# Altium PCB PCB1_main.PcbDoc
Units mm, origin at the board's own origin, x right, y up, seen from the top; angles counter-clockwise.
Board outline 140 x 35 mm, 2 copper layers (Top Layer, Bottom Layer); 22 components, 44 nets, 192 pads, 0 vias.
Unrouted connection lines stored in the file: 118.
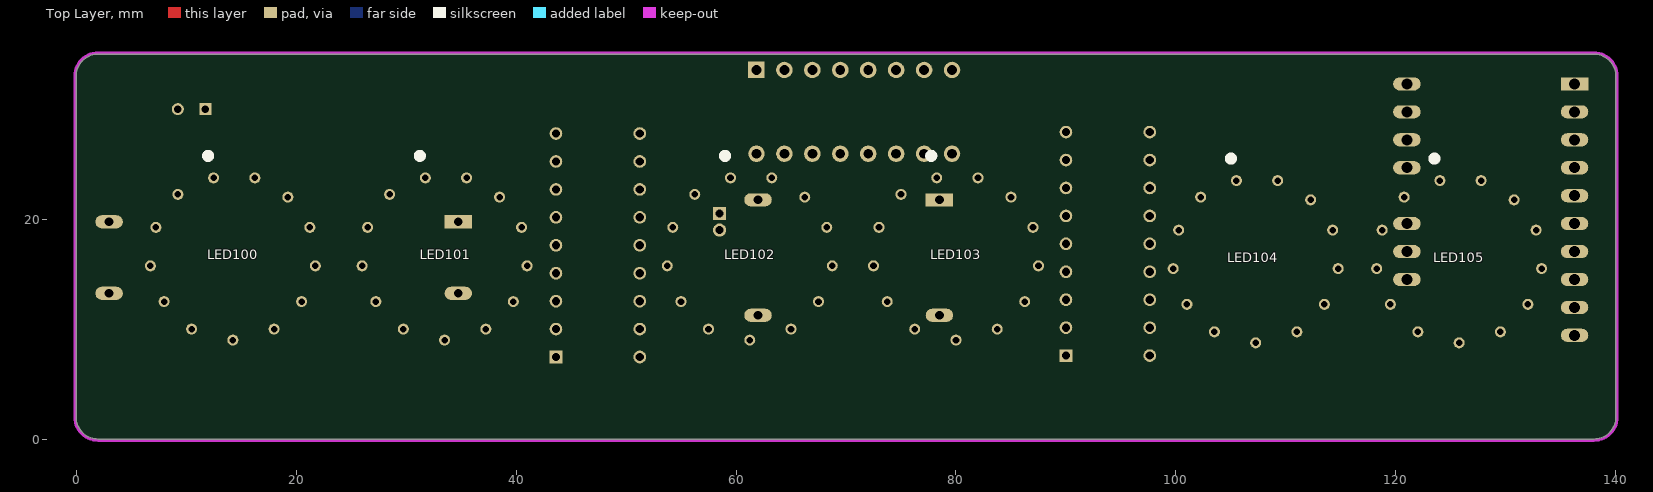
[diagram p0: Top Layer view]
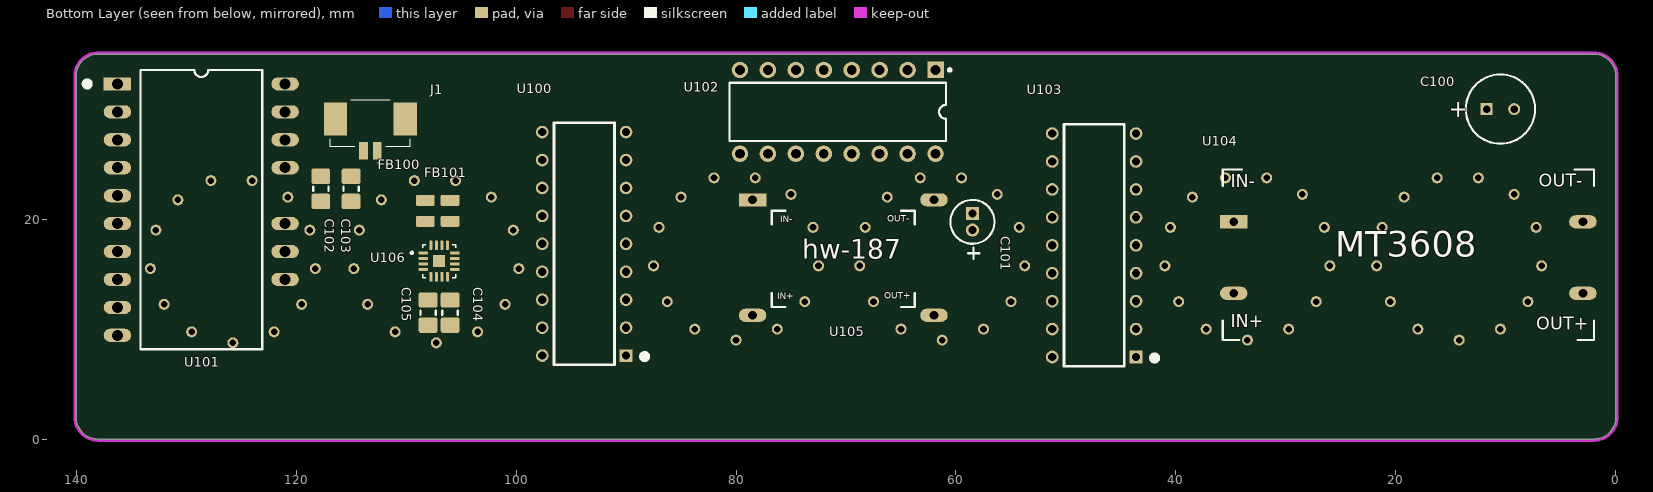
[diagram p1: Bottom Layer view, seen from below]

## Layer stack, top to bottom
Top Solder: solder mask 0.0102, Solder Resist, Dk 3.5
Top Layer: signal copper 0.0356
Dielectric 1: dielectric 0.32, FR-4, Dk 4.8
Bottom Layer: signal copper 0.0356
Bottom Solder: solder mask 0.0102, Solder Resist, Dk 3.5

## Board outline
2,0 cw(c2,2) 0,2 0,33 cw(c2,33) 2,35 138,35 cw(c138,33) 140,33 140,2 cw(c138,2) 138,0

## Design rules (kind name [scope] priority, off if disabled: settings)
Clearance [All] p1: gap=0.254 ignorepadtopadclearanceinfootprint=FALSE
PolygonConnect [All] p1: connectstyle=Relief reliefconductorwidth=0.254 reliefentries=4 polygonreliefangle="90 Angle" airgapwidth=0.254
RoutingVias [All] p1: holewidth=0.711 width=1.27 viastyle="Through Hole" minholewidth=0.711 minwidth=1.27 maxholewidth=0.711 maxwidth=1.27
SolderMaskExpansion [All] p1: expansion=0.102 istentingtop=FALSE
SupplyNets "Schematic Supply Nets_3" [InNet('GND')] p1: voltage=0.000
SupplyNets "Schematic Supply Nets_2" [InNet('VCC')] p2: voltage=0.000
SupplyNets "Schematic Supply Nets_1" [InNet('+5')] p3: voltage=0.000
SupplyNets "Schematic Supply Nets" [InNet('1V')] p4: voltage=0.000
Width [All] p1: maxlimit=0.254 minlimit=0.254 preferedwidth=0.254
30 further rules are at their usual default settings.

## Components (designator, comment, footprint, x,y, rotation, side; value= is the part's Value field where it differs from the comment)
C100 "100uF 10V" CAP_100U_10V_PRD250W50D630H800 11.75,30 r180 bottom
C101 "22u 10V" CAP_D4MM_LS1.5MM 58.5,19 r90 bottom
C102 "C0805" CAP_0805 117.75,22.75 r90 bottom
C103 "C0805" CAP_0805 115,22.75 r90 bottom
C104 "C0805" CAP_0805 106,11.5 r90 bottom
C105 "C0805" CAP_0805 108,11.5 r90 bottom
FB100 "FB0805  Ω" FB_0805 108.25,20.75 r90 bottom
FB101 "FB0805  Ω" FB_0805 106,20.75 r90 bottom
J1 "Connector 1.25mm" 532610271 113.25,28.5 r180 bottom
LED100 "VFD" VFD_TUBE_IV3 14.25,16.5 r0 top
LED101 "VFD" VFD_TUBE_IV3 33.5,16.5 r0 top
LED102 "VFD" VFD_TUBE_IV3 61.25,16.5 r0 top
LED103 "VFD" VFD_TUBE_IV3 80,16.5 r0 top
LED104 "VFD" VFD_TUBE_IV3 107.25,16.25 r0 top
LED105 "VFD" VFD_TUBE_IV3 125.75,16.25 r0 top
U100 "TBD6278" TBD62783_DIP762W55P254L2286H480Q18N 93.81,17.75 r0 bottom
U101 "ESP32C6_Mini" "ESP32_MINIMODULE - DUPLICATE" 136.24,32.29 r180 bottom
U102 "CD4017" CD4017_N0016A 70.75,29.75 r270 bottom
U103 "TDB6278" TBD62783_DIP762W55P254L2286H480Q18N 47.44,17.62 r0 bottom
U104 "DC-DC Boost" BOOST_MT3608 37.5,25.75 r180 bottom
U105 "DC-DC Buck" HW-187 78.5,21.75 r180 bottom
U106 "Class D AMP" TQFN-16_MAX98357 107,16.185 r180 bottom

## Footprints (in the part's own frame and the unit in brackets; to place one, negate y for a bottom-side part, rotate by r counter-clockwise, add the part's x,y. Pads: shape width x height; smd on the part's side, far side on the other; paste and mask are expansions set on the pad)
532610271 [mm]
  rect 0.8x1.6 smd: 1(0.625,-2.3) 2(-0.625,-2.3)
  rect 2.1x3 smd: MP1(3.175,0.6) MP2(-3.175,0.6)
  silkscreen extent -3.62,-3.45 3.62,2.3, body extent -3.83,-2.54 3.83,2.66, height 3.4
BOOST_MT3608 [mm]
  rect 2.5x1.2 hole 0.8: 1(2.75,-6)
  oval 2.5x1.2 hole 0.8: 2(2.75,-12.5) 3(34.5,-12.5) 4(34.5,-6)
  silkscreen extent 1.75,-16.75 35.5,-1.25, body extent 0.04,-17.79 37.05,-0.08, height 6.17
CAP_100U_10V_PRD250W50D630H800 [mm]
  rect 1.1x1.1 / inner round 1.1 / far side rect 1.1x1.1 hole 0.7: 1(0,0)
  round 1.1 hole 0.7: 2(2.5,0)
  silkscreen extent -1.9,-3.15 4.4,3.15, body extent -2.14,-3.4 4.65,3.4, height 8
CAP_0805 [mm]
  rrect25% 1.4x1.7 smd: 1(-1.143,0) 2(1.143,0)
  silkscreen extent -0.2,-0.7 0.2,0.7, body extent -1.15,-0.76 1.15,0.79, height 1.01
CAP_D4MM_LS1.5MM [mm]
  round 1.2 hole 0.7: 1(0,0)
  rect 1.2x1.2 / inner round 1.2 / far side rect 1.2x1.2 hole 0.7: 2(1.5,0)
  silkscreen extent -2.61,-2 2.75,2
CD4017_N0016A [mm] "DIP, 16-Leads, Body 19.7x6.6mm, Pitch 2.54mm"
  rect 1.5x1.5 hole 0.9: 1(-3.81,8.89)
  round 1.5 hole 0.9: 2(-3.81,6.35) 3(-3.81,3.81) 4(-3.81,1.27) 5(-3.81,-1.27) 6(-3.81,-3.81) 7(-3.81,-6.35) 8(-3.81,-8.89) 9(3.81,-8.89) 10(3.81,-6.35) 11(3.81,-3.81) 12(3.81,-1.27) 13(3.81,1.27) 14(3.81,3.81) 15(3.81,6.35) 16(3.81,8.89)
  silkscreen extent -3.93,-9.85 2.65,10.31, body extent -3.95,-9.85 3.95,9.85, height 5.08
"ESP32_MINIMODULE - DUPLICATE" [mm]
  rect 2.5x1.2 hole 1: 1(0,0)
  oval 2.5x1.2 hole 1: 2(0,-2.54) 3(0,-5.08) 4(0,-7.62) 5(0,-10.16) 6(0,-12.7) 7(0,-15.24) 8(0,-17.78) 9(0,-20.32) 10(0,-22.86) 13(15.24,-17.78) 14(15.24,-15.24) 15(15.24,-12.7) 17(15.24,-7.62) 18(15.24,-5.08) 19(15.24,-2.54) 20(15.24,0)
  silkscreen extent -3,-24.13 13.16,1.27, body extent -1.25,-24.25 16.75,3.72, height 4.53
FB_0805 [mm]
  rrect25% 1x1.7 smd: 1(-0.95,0) 2(0.95,0)
  body extent -1,-0.63 1,0.63, height 0.86
HW-187 [mm]
  rect 2.5x1.2 hole 0.8: 1(0,0)
  oval 2.5x1.2 hole 0.8: 2(0,-10.5) 3(16.5,-10.5) 4(16.5,0)
  silkscreen extent 1.75,-9.75 14.75,-1, body extent -0.75,-11.25 17.25,0.75, height 3.75
TBD62783_DIP762W55P254L2286H480Q18N [mm]
  rect 1.15x1.15 / inner round 1.15 / far side rect 1.15x1.15 hole 0.75: 1(-3.81,10.16)
  round 1.15 hole 0.75: 2(-3.81,7.62) 3(-3.81,5.08) 4(-3.81,2.54) 5(-3.81,0) 6(-3.81,-2.54) 7(-3.81,-5.08) 8(-3.81,-7.62) 9(-3.81,-10.16) 10(3.81,-10.16) 11(3.81,-7.62) 12(3.81,-5.08) 13(3.81,-2.54) 14(3.81,0) 15(3.81,2.54) 16(3.81,5.08) 17(3.81,7.62) 18(3.81,10.16)
  silkscreen extent -5.75,-11 2.75,11, body extent -3.95,-11.18 3.95,11.68, height 4.8
TQFN-16_MAX98357 [mm]
  rrect25% 0.84x0.27 smd: 1(-1.435,0.75) 2(-1.435,0.25) 3(-1.435,-0.25) 4(-1.435,-0.75) 9(1.435,-0.75) 10(1.435,-0.25) 11(1.435,0.25) 12(1.435,0.75)
  rrect25% 0.27x0.84 smd: 5(-0.75,-1.435) 6(-0.25,-1.435) 7(0.25,-1.435) 8(0.75,-1.435) 13(0.75,1.435) 14(0.25,1.435) 15(-0.25,1.435) 16(-0.75,1.435)
  rect 1.1x1.1 smd paste-0.2: 17(0,0)
  silkscreen extent -2.57,-1.5 1.5,1.5, body extent -1.5,-1.5 1.5,1.5, height 0.9
VFD_TUBE_IV3 [mm]
  round 1 hole 0.6: 1(-1.75,7.25) 2(2,7.25) 3(5,5.5) 4(7,2.75) 5(7.5,-0.75) 6(6.25,-4) 7(3.75,-6.5) 8(0,-7.5) 9(-3.75,-6.5) 10(-6.25,-4) 11(-7.5,-0.75) 12(-7,2.75) 13(-5,5.75)
  silkscreen extent -2.5,9 -2,9.5

## Part data
C100: library part CAP_100u_10V, "Cap Aluminum 100uF 10V 20% (6.3 X 7mm) Radial 2.5mm 80mA 1000 hr 85°C Bulk", Manufacturer=Panasonic, Manufacturer Part Number=ECE-A1AKA101, Supplier Part Number=667-ECE-A1AKA101, Category="Aluminum Electrolytic Capacitors", ComponentLink1Description=https://datasheet.ciiva.com/16390/aba0000ce20-16390502.pdf?src-supplier=Future+Electronics, ComponentLink1URL=https://datasheet.ciiva.com/16390/aba0000ce20-16390502.pdf?src-supplier=Future+Electronics, ComponentLink2Description=https://datasheet.ciiva.com/43459/1339511-43459559.pdf?src-supplier=Farnell, ComponentLink2URL=https://datasheet.ciiva.com/43459/1339511-43459559.pdf?src-supplier=Farnell, ComponentLink3Description=https://datasheet.ciiva.com/2984/aba0000ce20-2984487.pdf?src-supplier=Avnet, ComponentLink3URL=https://datasheet.ciiva.com/2984/aba0000ce20-2984487.pdf?src-supplier=Avnet, ComponentLink4Description=https://datasheet.ciiva.com/46397/1339511-46397446.pdf?src-supplier=Element14, ComponentLink4URL=https://datasheet.ciiva.com/46397/1339511-46397446.pdf?src-supplier=Element14, Pricing="1=0,21, 10=0,104, 50=0,104, 100=0,06, 1000=0,053, 10000=0,049 (USD)", RoHS=Yes, Stock=46, Supplier=Mouser
C101: library part CAP_22u_10V_ECE-A1AKA220, "Cap Aluminum 22uF 10V 20% Radial 1000h 85°C Bulk", Manufacturer=Panasonic, Manufacturer Part Number=ECE-A1AKA220, Supplier Part Number=667-ECE-A1AKA220, Category="Aluminum Electrolytic Capacitors", ComponentLink1Description=https://datasheet.ciiva.com/46451/1339511-46451258.pdf?src-supplier=Element14, ComponentLink1URL=https://datasheet.ciiva.com/46451/1339511-46451258.pdf?src-supplier=Element14, ComponentLink2Description=https://datasheet.ciiva.com/30183/aba0000ce20-30183486.pdf?src-supplier=Onlinecomponents.com, ComponentLink2URL=https://datasheet.ciiva.com/30183/aba0000ce20-30183486.pdf?src-supplier=Onlinecomponents.com, ComponentLink3Description=https://datasheet.ciiva.com/2984/aba0000ce20-2984488.pdf?src-supplier=Avnet, ComponentLink3URL=https://datasheet.ciiva.com/2984/aba0000ce20-2984488.pdf?src-supplier=Avnet, Pricing="1=0,29, 10=0,136, 50=0,136, 100=0,071, 1000=0,056, 10000=0,044 (USD)", RoHS=Yes, Stock=1909, Supplier=Mouser
C102 C103 C104 C105: library part CAP_0805, "Capacitor SMD 0805"
FB100 FB101: library part FB_0805, "Ferrite Bead SMD 0805"
J1: library part 53261-0271, "1.25mm Pitch PicoBlade™ Header, Surface Mount, Right Angle, Lead-Free, 2 Circuits", Color=Beige, Contact Resistance=20mΩ, Current Rating=5.5A, Flammability Rating="UL94 V-0", Insulation Resistance=100MΩ, Manufacturer=Molex, Manufacturer Lifecycle Status=ACTIVE, Max Operating Temperature=105°C, Min Operating Temperature=-40°C, Supplier Part Number=538-53261-0271, Voltage Rating=125V, Category="Headers and Wire Housings", China RoHS=Compliant, ComponentLink1Description=https://datasheet.octopart.com:443/53261-0271-Molex-datasheet-8522546.pdf?src-supplier=Master+Electronics, ComponentLink1URL=https://datasheet.octopart.com:443/53261-0271-Molex-datasheet-8522546.pdf?src-supplier=Master+Electronics, ComponentLink2Description=https://datasheet.octopart.com:443/53261-0271-Molex-datasheet-177725531.pdf?src-supplier=IHS, ComponentLink2URL=https://datasheet.octopart.com:443/53261-0271-Molex-datasheet-177725531.pdf?src-supplier=IHS, ComponentLink3Description=https://datasheet.octopart.com:443/53261-0271-Molex-datasheet-8343080.pdf?src-supplier=Future+Electronics, ComponentLink3URL=https://datasheet.octopart.com:443/53261-0271-Molex-datasheet-8343080.pdf?src-supplier=Future+Electronics, ComponentLink4Description=https://datasheet.octopart.com:443/532610271-Molex-datasheet-137316104.pdf?src-supplier=Future+Electronics, ComponentLink4URL=https://datasheet.octopart.com:443/532610271-Molex-datasheet-137316104.pdf?src-supplier=Future+Electronics, ComponentLink5Description=https://datasheet.octopart.com:443/53261-0271-Molex-datasheet-8331727.pdf?src-supplier=Molex, ComponentLink5URL=https://datasheet.octopart.com:443/53261-0271-Molex-datasheet-8331727.pdf?src-supplier=Molex, ComponentLink6Description=https://sigma.octopart.com:443/16413759/technical_drawing/Molex-532610271.pdf?src-supplier=Molex, ComponentLink6URL=https://sigma.octopart.com:443/16413759/technical_drawing/Molex-532610271.pdf?src-supplier=Molex, ComponentLink7Description=https://datasheet.octopart.com:443/532610271-Molex-datasheet-13786009.pdf?src-supplier=Sager+Electronics, ComponentLink7URL=https://datasheet.octopart.com:443/532610271-Molex-datasheet-13786009.pdf?src-supplier=Sager+Electronics, ComponentLink8Description=https://datasheet.octopart.com:443/53261-0271-Molex-datasheet-14711292.pdf?src-supplier=element14+APAC, ComponentLink8URL=https://datasheet.octopart.com:443/53261-0271-Molex-datasheet-14711292.pdf?src-supplier=element14+APAC, ComponentLink9Description=https://datasheet.octopart.com:443/53261-0271-Molex-datasheet-101583399.pdf?src-supplier=Farnell, ComponentLink9URL=https://datasheet.octopart.com:443/53261-0271-Molex-datasheet-101583399.pdf?src-supplier=Farnell, ComponentLink10Description=https://datasheet.octopart.com:443/53261-0271.-Molex-datasheet-77558175.pdf?src-supplier=Farnell, ComponentLink10URL=https://datasheet.octopart.com:443/53261-0271.-Molex-datasheet-77558175.pdf?src-supplier=Farnell, ComponentLink11Description=https://datasheet.octopart.com:443/53261-0271-Molex-datasheet-11023919.pdf?src-supplier=Farnell, ComponentLink11URL=https://datasheet.octopart.com:443/53261-0271-Molex-datasheet-11023919.pdf?src-supplier=Farnell, ComponentLink12Description=https://datasheet.octopart.com:443/532610271-Molex-datasheet-520094.pdf?src-supplier=Farnell, ComponentLink12URL=https://datasheet.octopart.com:443/532610271-Molex-datasheet-520094.pdf?src-supplier=Farnell, ComponentLink13Description=https://datasheet.octopart.com:443/53261-0271-Molex-datasheet-41177771.pdf?src-supplier=Newark, ComponentLink13URL=https://datasheet.octopart.com:443/53261-0271-Molex-datasheet-41177771.pdf?src-supplier=Newark, ComponentLink14Description=https://datasheet.octopart.com:443/53261-0271-Molex-datasheet-27120403.pdf?src-supplier=Newark, ComponentLink14URL=https://datasheet.octopart.com:443/53261-0271-Molex-datasheet-27120403.pdf?src-supplier=Newark, ComponentLink15Description=https://datasheet.octopart.com:443/53261-0271-Molex-datasheet-140186584.pdf?src-supplier=RS+(Formerly+Allied+Electronics), ComponentLink15URL=https://datasheet.octopart.com:443/53261-0271-Molex-datasheet-140186584.pdf?src-supplier=RS+(Formerly+Allied+Electronics), ComponentLink16Description=https://datasheet.octopart.com:443/53261-0271-Molex-datasheet-120153897.pdf?src-supplier=RS+(Formerly+Allied+Electronics), ComponentLink16URL=https://datasheet.octopart.com:443/53261-0271-Molex-datasheet-120153897.pdf?src-supplier=RS+(Formerly+Allied+Electronics), ComponentLink17Description=https://datasheet.octopart.com:443/53261-0271-Molex-datasheet-34442330.pdf?src-supplier=RS+(Formerly+Allied+Electronics), ComponentLink17URL=https://datasheet.octopart.com:443/53261-0271-Molex-datasheet-34442330.pdf?src-supplier=RS+(Formerly+Allied+Electronics), ComponentLink18Description=https://datasheet.octopart.com:443/53261-0271-Molex-datasheet-27710088.pdf?src-supplier=RS+(Formerly+Allied+Electronics), ComponentLink18URL=https://datasheet.octopart.com:443/53261-0271-Molex-datasheet-27710088.pdf?src-supplier=RS+(Formerly+Allied+Electronics), ComponentLink19Description=https://datasheet.octopart.com:443/53261-0271-Molex-datasheet-62281348.pdf?src-supplier=Electro+Sonic, ComponentLink19URL=https://datasheet.octopart.com:443/53261-0271-Molex-datasheet-62281348.pdf?src-supplier=Electro+Sonic, ComponentLink20Description=https://datasheet.octopart.com:443/53261-0271-Molex-datasheet-23710575.pdf?src-supplier=Electro+Sonic, ComponentLink20URL=https://datasheet.octopart.com:443/53261-0271-Molex-datasheet-23710575.pdf?src-supplier=Electro+Sonic, ComponentLink21Description=https://datasheet.octopart.com:443/53261-0271-Molex-datasheet-26579557.pdf?src-supplier=TME, ComponentLink21URL=https://datasheet.octopart.com:443/53261-0271-Molex-datasheet-26579557.pdf?src-supplier=TME, ComponentLink22Description=https://datasheet.octopart.com:443/53261-0271-Molex-datasheet-17741841.pdf?src-supplier=Jameco, ComponentLink22URL=https://datasheet.octopart.com:443/53261-0271-Molex-datasheet-17741841.pdf?src-supplier=Jameco, ComponentLink23Description=https://datasheet.octopart.com:443/53261-0271-Molex-datasheet-144901.pdf?src-supplier=DigiKey, ComponentLink23URL=https://datasheet.octopart.com:443/53261-0271-Molex-datasheet-144901.pdf?src-supplier=DigiKey, ComponentLink24Description=https://datasheet.octopart.com:443/532-61-0271-Molex-datasheet-100429.pdf?src-supplier=element14, ComponentLink24URL=https://datasheet.octopart.com:443/532-61-0271-Molex-datasheet-100429.pdf?src-supplier=element14, ComponentLink25Description=http://sigma.octopart.com:80/16413755/rohs_statement/Molex-532610271.pdf?src-supplier=Compliance+Statements, ComponentLink25URL=http://sigma.octopart.com:80/16413755/rohs_statement/Molex-532610271.pdf?src-supplier=Compliance+Statements, ComponentLink26Description=http://sigma.octopart.com:80/conflict_mineral_statement/Molex-company-72.pdf?src-supplier=Compliance+Statements, ComponentLink26URL=http://sigma.octopart.com:80/conflict_mineral_statement/Molex-company-72.pdf?src-supplier=Compliance+Statements, ComponentLink27Description=http://sigma.octopart.com:80/rohs_statement/Molex-company-73.pdf?src-supplier=Compliance+Statements, ComponentLink27URL=http://sigma.octopart.com:80/rohs_statement/Molex-company-73.pdf?src-supplier=Compliance+Statements, ComponentLink28Description=http://sigma.octopart.com:80/reach_statement/Molex-company-74.pdf?src-supplier=Compliance+Statements, ComponentLink28URL=http://sigma.octopart.com:80/reach_statement/Molex-company-74.pdf?src-supplier=Compliance+Statements, Contact Gender=Male, Contact Plating=Tin, Country of Origin=SG, Gender=Male, Glow Wire Compliant=Non-compliant, Height=3.4mm, Housing Material=Nylon, Lead Free="Lead Free", Lead Pitch=1.25mm, Length=7.65mm, Lifecycle Status=Production, Manufacturer Part Number=53261-0271, Mounting Technology="Surface Mount", Number of Circuits=2, Number of Contacts=2, Number of Positions=2, Number of Rows=1, Orientation="Right Angle", Packaging="Cut Tape", Pins=2, Pitch=1.25mm, Plating=Tin, Plating Thickness=990.6nm, Pricing="1=0,51, 10=0,455, 50=0,436, 100=0,387, 1000=0,301, 10000=0,27 (USD)", Radiation Hardening=No, REACH SVHC=Yes, RoHS=Compliant, Schedule B="8536694040, 8536694040|8536694040|8536694040|8536694040|8536694040|8536694040|8536694040|8536694040|8536694040|8536694040|8536694040|8536694040|8536694040|8536694040|8536694040|8536694040|8536694040|8536694040|8536694040|8536694040|8536694040|8536694040|8536694040|85", Stock=82573, Supplier=Mouser, Terminal Pitch=1.25mm, Termination="SMD/SMT, Solder", Voltage Rating (AC)=125V, Voltage Rating (DC)=125V, Width=4.2mm, Working Voltage=125V
LED100 LED101 LED102 LED103 LED104 LED105: library part VFD_Tube_IV3, "96x10.6 mm"
U100 U103: library part TBD62783APG, "Buffer/Inverter Based Peripheral Driver, 1 Driver, 0.4A, DMOS, PDIP18", Case/Package=DIP, Manufacturer=Toshiba, Max Operating Temperature=85°C, Max Output current=400mA, Max Supply Current=1.5mA, Max Supply Voltage=50V, Min Operating Temperature=-40°C, Min Supply Voltage=2V, Operating Supply Voltage=5V, Supplier Part Number=757-TBD62783APG, Category="Power Switch ICs - Power Distribution", ComponentLink1Description=https://datasheet.octopart.com:443/TBD62783APG-Toshiba-datasheet-68329876.pdf?src-supplier=IHS, ComponentLink1URL=https://datasheet.octopart.com:443/TBD62783APG-Toshiba-datasheet-68329876.pdf?src-supplier=IHS, Height - Seated (Max)=4.8mm, Interface=On/Off, Length=22.86mm, Lifecycle Status=Production, Manufacturer Part Number=TBD62783APG, Number of Channels=8, Number of Circuits=8, Number of Outputs=8, Number of Terminals=18, Number of Transmitters=1, Output Configuration="High Side", Output Voltage=50V, Pricing="1=2,34, 10=1,46, 50=1,4, 100=1,35, 1000=1,24, 10000=1,19 (USD)", RoHS=Compliant, Stock=7346, Supplier=Mouser, Supplier 1=Mouser, Supplier Part Number 1=757-TBD62783APG, Terminal Pitch=2.54mm, Width=7.62mm
U101: library part ESP32C6_mini_module, "ESP32-C6 Super Mini is a development board based on the ESP32C6 microcontroller using RISCV32 architecture."
U102: library part CD4017BE, "Counter; PDIP; Counter Logic; 3 V to 18 V; -55; +125; 0.04 Ua to 0.08 Ua Icc; 5", Case/Package=PDIP, Frequency=11MHz, Manufacturer="Texas Instruments", Manufacturer Lifecycle Status=ACTIVE, Max Operating Temperature=125°C, Max Supply Voltage=18V, Min Operating Temperature=-55°C, Min Supply Voltage=3V, Output Current=1.5mA, Quiescent Current=100µA, Supplier Part Number=595-CD4017BE, Category=Counters, Clock Edge Trigger Type="Positive Edge", ComponentLink1Description=https://datasheet.octopart.com:443/CD4017BE-Texas-Instruments-datasheet-10748468.pdf?src-supplier=Texas+Instruments, ComponentLink1URL=https://datasheet.octopart.com:443/CD4017BE-Texas-Instruments-datasheet-10748468.pdf?src-supplier=Texas+Instruments, ComponentLink2Description=https://octopart.com:443/opatz8j6/c1?t=3k2FlkM7OhGjdAJw6uhZRZPpAud7BMHweqXBytVZhQ-0jhG-GAdzlQ4I78FykeNzveRZRDiGEnOmJnlwhDAerQ7XerPQbRk9ZqJ8fh-JFk-NBA_p0G_aRaaikVjBOZGi7BDezEpwyn-qNc3O93cQt2BGGu1pbCULKfXSuZMFyH5194iACgutjtV10PeKfw8KVSf5UBK_cxFLQcQ_Dtbuyq01eNVVbC8C7D4Gu-3dAmmUk6EMk2ugf-3GnxnOYLmcxrl3Pf1NzwrCKC19ARxoh0WAkbMHR5DniOKtLLlwzOi4JBiMm2AJRkW_uFf62YSIH4NIdhS5Tqbpb7I73gYwReX-DItx6qbwlRk52w0fSslDk6iutyacFAlz__RbBUseuw&src-supplier=Texas+Instruments, ComponentLink2URL=https://octopart.com:443/opatz8j6/c1?t=3k2FlkM7OhGjdAJw6uhZRZPpAud7BMHweqXBytVZhQ-0jhG-GAdzlQ4I78FykeNzveRZRDiGEnOmJnlwhDAerQ7XerPQbRk9ZqJ8fh-JFk-NBA_p0G_aRaaikVjBOZGi7BDezEpwyn-qNc3O93cQt2BGGu1pbCULKfXSuZMFyH5194iACgutjtV10PeKfw8KVSf5UBK_cxFLQcQ_Dtbuyq01eNVVbC8C7D4Gu-3dAmmUk6EMk2ugf-3GnxnOYLmcxrl3Pf1NzwrCKC19ARxoh0WAkbMHR5DniOKtLLlwzOi4JBiMm2AJRkW_uFf62YSIH4NIdhS5Tqbpb7I73gYwReX-DItx6qbwlRk52w0fSslDk6iutyacFAlz__RbBUseuw&src-supplier=Texas+Instruments, ComponentLink3Description=https://datasheet.octopart.com:443/CD4017BE-Texas-Instruments-datasheet-10257688.pdf?src-supplier=Texas+Instruments, ComponentLink3URL=https://datasheet.octopart.com:443/CD4017BE-Texas-Instruments-datasheet-10257688.pdf?src-supplier=Texas+Instruments, ComponentLink4Description=https://datasheet.octopart.com:443/CD4017BE-Texas-Instruments-datasheet-151115.pdf?src-supplier=Texas+Instruments, ComponentLink4URL=https://datasheet.octopart.com:443/CD4017BE-Texas-Instruments-datasheet-151115.pdf?src-supplier=Texas+Instruments, ComponentLink5Description=https://sigma.octopart.com:443/49249812/technical_drawing/Texas-Instruments-CD4017BE.pdf?src-supplier=Texas+Instruments, ComponentLink5URL=https://sigma.octopart.com:443/49249812/technical_drawing/Texas-Instruments-CD4017BE.pdf?src-supplier=Texas+Instruments, ComponentLink6Description=https://datasheet.octopart.com:443/CD4017BE-Texas-Instruments-datasheet-47642656.pdf?src-supplier=element14+APAC, ComponentLink6URL=https://datasheet.octopart.com:443/CD4017BE-Texas-Instruments-datasheet-47642656.pdf?src-supplier=element14+APAC, ComponentLink7Description=https://datasheet.octopart.com:443/CD4017BE-Texas-Instruments-datasheet-102486847.pdf?src-supplier=element14+APAC, ComponentLink7URL=https://datasheet.octopart.com:443/CD4017BE-Texas-Instruments-datasheet-102486847.pdf?src-supplier=element14+APAC, ComponentLink8Description=https://datasheet.octopart.com:443/CD4017BE-Texas-Instruments-datasheet-27379339.pdf?src-supplier=Farnell, ComponentLink8URL=https://datasheet.octopart.com:443/CD4017BE-Texas-Instruments-datasheet-27379339.pdf?src-supplier=Farnell, ComponentLink9Description=https://datasheet.octopart.com:443/CD4017BE-Texas-Instruments-datasheet-21412874.pdf?src-supplier=Farnell, ComponentLink9URL=https://datasheet.octopart.com:443/CD4017BE-Texas-Instruments-datasheet-21412874.pdf?src-supplier=Farnell, ComponentLink10Description=https://datasheet.octopart.com:443/CD4017BE-Texas-Instruments-datasheet-31678.pdf?src-supplier=Newark, ComponentLink10URL=https://datasheet.octopart.com:443/CD4017BE-Texas-Instruments-datasheet-31678.pdf?src-supplier=Newark, ComponentLink11Description=https://datasheet.octopart.com:443/CD4017BE-Texas-Instruments-datasheet-177784054.pdf?src-supplier=Burklin+Elektronik, ComponentLink11URL=https://datasheet.octopart.com:443/CD4017BE-Texas-Instruments-datasheet-177784054.pdf?src-supplier=Burklin+Elektronik, ComponentLink12Description=https://datasheet.octopart.com:443/CD4017BE-Texas-Instruments-datasheet-164413264.pdf?src-supplier=SHENGYU+ELECTRONICS, ComponentLink12URL=https://datasheet.octopart.com:443/CD4017BE-Texas-Instruments-datasheet-164413264.pdf?src-supplier=SHENGYU+ELECTRONICS, ComponentLink13Description=https://datasheet.octopart.com:443/CD4017BE-Texas-Instruments-datasheet-160672318.pdf?src-supplier=LCSC, ComponentLink13URL=https://datasheet.octopart.com:443/CD4017BE-Texas-Instruments-datasheet-160672318.pdf?src-supplier=LCSC, ComponentLink14Description=https://datasheet.octopart.com:443/CD4017BE-Texas-Instruments-datasheet-159114753.pdf?src-supplier=LCSC, ComponentLink14URL=https://datasheet.octopart.com:443/CD4017BE-Texas-Instruments-datasheet-159114753.pdf?src-supplier=LCSC, ComponentLink15Description=https://datasheet.octopart.com:443/CD4017BE-Texas-Instruments-datasheet-14145910.pdf?src-supplier=iiiC, ComponentLink15URL=https://datasheet.octopart.com:443/CD4017BE-Texas-Instruments-datasheet-14145910.pdf?src-supplier=iiiC, ComponentLink16Description=https://datasheet.octopart.com:443/CD4017BE-Texas-Instruments-datasheet-8369086.pdf?src-supplier=element14, ComponentLink16URL=https://datasheet.octopart.com:443/CD4017BE-Texas-Instruments-datasheet-8369086.pdf?src-supplier=element14, ComponentLink17Description=https://datasheet.octopart.com:443/CD4017BE-Texas-Instruments-datasheet-5333222.pdf?src-supplier=Verical, ComponentLink17URL=https://datasheet.octopart.com:443/CD4017BE-Texas-Instruments-datasheet-5333222.pdf?src-supplier=Verical, ComponentLink18Description=https://datasheet.octopart.com:443/CD4017BE-Texas-Instruments-datasheet-7284308.pdf?src-supplier=Jameco, ComponentLink18URL=https://datasheet.octopart.com:443/CD4017BE-Texas-Instruments-datasheet-7284308.pdf?src-supplier=Jameco, ComponentLink19Description=https://datasheet.octopart.com:443/CD4017BE-Texas-Instruments-datasheet-98236.pdf?src-supplier=RS+(Formerly+Allied+Electronics), ComponentLink19URL=https://datasheet.octopart.com:443/CD4017BE-Texas-Instruments-datasheet-98236.pdf?src-supplier=RS+(Formerly+Allied+Electronics), ComponentLink20Description=https://datasheet.octopart.com:443/CD4017BE-Texas-Instruments-datasheet-115811.pdf?src-supplier=Sierra+IC, ComponentLink20URL=https://datasheet.octopart.com:443/CD4017BE-Texas-Instruments-datasheet-115811.pdf?src-supplier=Sierra+IC, ComponentLink21Description=http://sigma.octopart.com:80/conflict_mineral_statement/Texas-Instruments-company-63.pdf?src-supplier=Compliance+Statements, ComponentLink21URL=http://sigma.octopart.com:80/conflict_mineral_statement/Texas-Instruments-company-63.pdf?src-supplier=Compliance+Statements, ComponentLink22Description=http://sigma.octopart.com:80/reach_statement/Texas-Instruments-company-64.pdf?src-supplier=Compliance+Statements, ComponentLink22URL=http://sigma.octopart.com:80/reach_statement/Texas-Instruments-company-64.pdf?src-supplier=Compliance+Statements, Contact Plating=Gold, Direction=Unidirectional, Height=5.08mm, Lead Free="Lead Free", Length=19.3mm, Lifecycle Status=Production, Logic Function=Counter, Manufacturer Part Number=CD4017BE, Mounting Technology="Through Hole", Number of Bits=4, Number of Bits per Element=10, Number of Elements=1, Number of Gates=1, Pins=16, Pricing="1=1,27, 10=0,925, 50=0,837, 100=0,741, 1000=0,621, 10000=0,581 (USD)", Propagation Delay=650ns, Radiation Hardening=No, REACH SVHC=No, Reset=Asynchronous, RoHS=Compliant, Schedule B="8542390000, 8542390000|8542390000, 8542390000|8542390000|8542390000, 8542390000|8542390000|8542390000|8542390000", Stock=2110, Supplier=Mouser, Sync/Async=Synchronous, Thickness=3.9mm, Turn-On Delay Time=650ns, Weight=951.693491mg, Width=6.35mm
U104: library part MODULE_MT3608, "Step-up Boost Converter MT3608 2A"
U105: library part HW-187, "DC-DC 4.7V-23V to 1V-17V Buck Converter Step Down"
U106: library part MAX98357AETE+T, "MAX98357A Series 5.5 V 3.2 W PCM Input Class D Mono Audio Power Amplifier - TQFN-16", Manufacturer="Analog Devices", Manufacturer Lifecycle Status=PRODUCTION, Max Junction Temperature (Tj)=150°C, Max Operating Temperature=85°C, Max Output current=1.6A, Max Output Power=3.2W, Max Power Dissipation=1.666W, Max Supply Voltage=5.5V, Min Operating Temperature=-40°C, Min Supply Voltage=2.5V, Power Supply Rejection Ratio (PSRR)=77dB, Supplier Part Number=2949165, Supplier Part Number 1=700-MAX98357AETE+T, Voltage Gain=15dB, Category="Amplifiers - Audio", ComponentLink1Description=https://octopart.com:443/opatz8j6/c1?t=jSSDwXK4rxkAGXwUFBueHrzywhHGVOV41g_sgXETpVIkv8Ksp9X3FLnB-JNrs6KkstM7iebvHU0uZ6rWIokKmX8Tcy-QKto-68anl9XHLjGbmXXxgcOpqgle2nWz5i2KCI6AOb8I36lcrSBTJi5dmiHrRAcD9qCXaf3TZ2UDe0p0qNbiSZFyZj_kACVaH05CxxbHgDKxkkh8YefDpjz86C_drTYHs14o_OjqZsmjRf_U9dVv5MhWnOSaCVsYyd7VEEqUj1308_EupIz63q-NlRhv2s02NtNZvB6pgWaXskreutUSh-JjzVb0AqE&src-supplier=Analog+Devices, ComponentLink1URL=https://octopart.com:443/opatz8j6/c1?t=jSSDwXK4rxkAGXwUFBueHrzywhHGVOV41g_sgXETpVIkv8Ksp9X3FLnB-JNrs6KkstM7iebvHU0uZ6rWIokKmX8Tcy-QKto-68anl9XHLjGbmXXxgcOpqgle2nWz5i2KCI6AOb8I36lcrSBTJi5dmiHrRAcD9qCXaf3TZ2UDe0p0qNbiSZFyZj_kACVaH05CxxbHgDKxkkh8YefDpjz86C_drTYHs14o_OjqZsmjRf_U9dVv5MhWnOSaCVsYyd7VEEqUj1308_EupIz63q-NlRhv2s02NtNZvB6pgWaXskreutUSh-JjzVb0AqE&src-supplier=Analog+Devices, ComponentLink2Description=https://datasheet.octopart.com:443/MAX98357AETE%2BT-Analog-Devices-datasheet-140103828.pdf?src-supplier=Upverter, ComponentLink2URL=https://datasheet.octopart.com:443/MAX98357AETE%2BT-Analog-Devices-datasheet-140103828.pdf?src-supplier=Upverter, ComponentLink3Description=https://datasheet.octopart.com:443/MAX98357AETE%2BT-Maxim-Integrated-datasheet-82537686.pdf?src-supplier=Upverter, ComponentLink3URL=https://datasheet.octopart.com:443/MAX98357AETE%2BT-Maxim-Integrated-datasheet-82537686.pdf?src-supplier=Upverter, ComponentLink4Description=https://sigma.octopart.com:443/141243535/technical_drawing/Maxim-Integrated-MAX98357AETE%2BT.pdf?src-supplier=Upverter, ComponentLink4URL=https://sigma.octopart.com:443/141243535/technical_drawing/Maxim-Integrated-MAX98357AETE%2BT.pdf?src-supplier=Upverter, ComponentLink5Description=https://datasheet.octopart.com:443/MAX98357AETE%2BT-Maxim-Integrated-datasheet-134531866.pdf?src-supplier=Augswan, ComponentLink5URL=https://datasheet.octopart.com:443/MAX98357AETE%2BT-Maxim-Integrated-datasheet-134531866.pdf?src-supplier=Augswan, ComponentLink6Description=https://sigma.octopart.com:443/140082349/technical_drawing/Maxim-Integrated-MAX98357AETE%2BT.pdf?src-supplier=ShanghaiCT, ComponentLink6URL=https://sigma.octopart.com:443/140082349/technical_drawing/Maxim-Integrated-MAX98357AETE%2BT.pdf?src-supplier=ShanghaiCT, ComponentLink7Description=https://datasheet.octopart.com/MAX98357AETE%2BT-Maxim-Integrated-datasheet-38886134.pdf, ComponentLink7URL=https://datasheet.octopart.com/MAX98357AETE%2BT-Maxim-Integrated-datasheet-38886134.pdf, ComponentLink8Description=https://datasheet.octopart.com:443/MAX98357AETE%2BT-Maxim-Integrated-datasheet-8516998.pdf?src-supplier=Future+Electronics, ComponentLink8URL=https://datasheet.octopart.com:443/MAX98357AETE%2BT-Maxim-Integrated-datasheet-8516998.pdf?src-supplier=Future+Electronics, ComponentLink9Description=http://sigma.octopart.com:80/conflict_mineral_statement/Analog-Devices-company-33.pdf?src-supplier=Compliance+Statements, ComponentLink9URL=http://sigma.octopart.com:80/conflict_mineral_statement/Analog-Devices-company-33.pdf?src-supplier=Compliance+Statements, ComponentLink10Description=http://sigma.octopart.com:80/conflict_mineral_statement/Maxim-Integrated-company-65.pdf?src-supplier=Compliance+Statements, ComponentLink10URL=http://sigma.octopart.com:80/conflict_mineral_statement/Maxim-Integrated-company-65.pdf?src-supplier=Compliance+Statements, ComponentLink11Description=http://sigma.octopart.com:80/rohs_statement/Maxim-Integrated-company-66.pdf?src-supplier=Compliance+Statements, ComponentLink11URL=http://sigma.octopart.com:80/rohs_statement/Maxim-Integrated-company-66.pdf?src-supplier=Compliance+Statements, ComponentLink12Description=http://sigma.octopart.com:80/reach_statement/Maxim-Integrated-company-67.pdf?src-supplier=Compliance+Statements, ComponentLink12URL=http://sigma.octopart.com:80/reach_statement/Maxim-Integrated-company-67.pdf?src-supplier=Compliance+Statements, ComponentLink13Description=https://octopart.com:443/opatz8j6/c1?t=ZQo3IuyQoDbGFdP4CniPs-Qp0yjZjdyMx_ZBvD41Li-m-oi7UUXrzXA15IwX2tZHuHwgyJUvSxQsK1O1f7wko09Fi4QWcoyLdlke-Sw9Ykoc7RBK7pVcbql_U8IcHmfopmV1DvOo7bq0DrEf72et6J2-D0rtM85o62v4YQH4Dfg97wQq-Hh2C9nDQL-hMTN4n5K6MzvejDsfd6tiUgbgpvHuuZYpyGFt_kGc4DtcDxQ6GUgamQa4armI8zRaSOOyAdIbmzXi8ZFlmgMnqA9oR8lDcjUYP2_yWEw6ce6NuEHopK_uj9iPCZCwIcA&src-supplier=Compliance+Statements, ComponentLink13URL=https://octopart.com:443/opatz8j6/c1?t=ZQo3IuyQoDbGFdP4CniPs-Qp0yjZjdyMx_ZBvD41Li-m-oi7UUXrzXA15IwX2tZHuHwgyJUvSxQsK1O1f7wko09Fi4QWcoyLdlke-Sw9Ykoc7RBK7pVcbql_U8IcHmfopmV1DvOo7bq0DrEf72et6J2-D0rtM85o62v4YQH4Dfg97wQq-Hh2C9nDQL-hMTN4n5K6MzvejDsfd6tiUgbgpvHuuZYpyGFt_kGc4DtcDxQ6GUgamQa4armI8zRaSOOyAdIbmzXi8ZFlmgMnqA9oR8lDcjUYP2_yWEw6ce6NuEHopK_uj9iPCZCwIcA&src-supplier=Compliance+Statements, Contact Plating=Tin, Height=800µm, Lifecycle Status=Production, Manufacturer Part Number=MAX98357AETE+T, Mounting Technology="Surface Mount", Number of Channels=1, Output Power=3.2W, Packaging="Tape & Reel", Pins=16, Pricing="1=3,17, 10=2,39, 25=2,19, 100=1,98, 250=1,86, 500=1,8 (EUR)", Radiation Hardening=No, RoHS=Compliant, Schedule B=8542330000|8542330000|8542330000|8542330000|8542330000|8542330000|8542330000|8542330000|8542330000|8542330000|8542330000|8542330000|8542330000|8542330000|8542330000|8542330000|8542330000|8542330000|8542330000|8542330000|8542330000|8542330000|8542330000|85, Stock=25775, Supplier=Farnell, Supplier 1=Mouser

## Nets (pads, with @x,y where several pads share a name; then routed paths per layer and width w, separated by ;. In a path a pad name is that pad's centre, name@x,y a point inside that pad or via, vN(x,y) a via of type N, cw(c..) or ccw(c..) an arc to the next point about the centre after c; other vN are vias at no path point)
1V: C101.1 LED100.8 LED101.8 LED102.8 LED103.8 LED104.8 LED105.8 U105.3
+5: C104.2 C105.2 U101.20 U102.16 U104.2 U105.1 U106.7 U106.8
A_SEG: LED100.3 LED101.3 LED102.3 LED103.3 LED104.3 LED105.3 U100.11
B_SEG: LED100.2 LED101.2 LED102.2 LED103.2 LED104.2 LED105.2 U100.12
BCLK: U101.13 U106.16
C_SEG: LED100.13 LED101.13 LED102.13 LED103.13 LED104.13 LED105.13 U100.13
D_SEG: LED100.12 LED101.12 LED102.12 LED103.12 LED104.12 LED105.12 U100.14
DIN: U106.1
E_SEG: LED100.10 LED101.10 LED102.10 LED103.10 LED104.10 LED105.10 U100.15
F_SEG: LED100.9 LED101.9 LED102.9 LED103.9 LED104.9 LED105.9 U100.16
G_SEG: LED100.5 LED101.5 LED102.5 LED103.5 LED104.5 LED105.5 U100.18
GND: C102.1 C103.1 C104.1 C105.1 LED100.1 LED101.1 LED102.1 LED103.1 LED104.1 LED105.1 U100.10 U101.19 U102.8 U102.13 U103.7 U103.8 U103.10 U104.1 U105.2 U106.3 U106.11 U106.15 U106.17
IN1: U102.3 U103.1
IN2: U102.2 U103.2
IN3: U102.4 U103.3
IN4: U102.7 U103.4
IN5: U102.10 U103.5
IN6: U102.1 U103.6
IO0: U100.8 U101.3
IO1: U100.7 U101.4
IO2: U100.6 U101.5
IO3: U100.5 U101.6
IO4: U100.4 U101.7
IO5: U100.3 U101.8
IO6: U100.2 U101.9
IO7: U100.1 U101.10
IO18: U101.15 U102.14
IO19: U102.15
LRCLK: U101.14 U106.14
NetC100_2: C100.2 U104.4
NetC101_2: C101.2 U105.4
OUTN: FB101.1 U106.10
OUTP: FB100.1 U106.9
P_SEG: LED100.6 LED101.6 LED102.6 LED103.6 LED104.6 LED105.6 U100.17
SD_MODE: U106.4
SPEAKN: C103.2 FB101.2 J1.1
SPEAKP: C102.2 FB100.2 J1.2
VCC: C100.1 U100.9 U103.9 U104.3
VFD1: LED105.7 U103.18
VFD2: LED104.7 U103.17
VFD3: LED103.7 U103.16
VFD4: LED102.7 U103.15
VFD5: LED101.7 U103.14
VFD6: LED100.7 U103.13
pads on no net: J1.MP1 J1.MP2 LED100.4 LED100.11 LED101.4 LED101.11 LED102.4 LED102.11 LED103.4 LED103.11 LED104.4 LED104.11 LED105.4 LED105.11 U101.1 U101.2 U101.17 U101.18 U102.5 U102.6 U102.9 U102.11 U102.12 U103.11 U103.12 U106.2 U106.5 U106.6 U106.12 U106.13

## Keep-outs
Keep-Out Layer:
  lines w0.254: -0.127,2 ccw(c2,2) 2,-0.127 ; -0.127,2 -0.127,33 ; -0.127,2 -0.127,2 ; -0.127,33 cw(c2,33) 2,35.127 ; -0.127,33 -0.127,33 ; 2,-0.127 138,-0.127 ; 2,-0.127 2,-0.127 ; 2,35.127 138,35.127 ; 2,35.127 2,35.127 ; 138,-0.127 ccw(c138,2) 140.127,2 140.127,33 ; 138,-0.127 138,-0.127 ; 138,35.127 cw(c138,33) 140.127,33 ; 138,35.127 138,35.127 ; 140.127,33 140.127,33

## Silkscreen, mask and mechanical layers (free items; w line width, h text height)
Board Outline:
  lines w0.254: -0.127,2 ccw(c2,2) 2,-0.127 ; -0.127,2 -0.127,33 ; -0.127,2 -0.127,2 ; -0.127,33 cw(c2,33) 2,35.127 ; -0.127,33 -0.127,33 ; 2,-0.127 138,-0.127 ; 2,-0.127 2,-0.127 ; 2,35.127 138,35.127 ; 2,35.127 2,35.127 ; 138,-0.127 ccw(c138,2) 140.127,2 140.127,33 ; 138,-0.127 138,-0.127 ; 138,35.127 cw(c138,33) 140.127,33 ; 138,35.127 138,35.127 ; 140.127,33 140.127,33
Board Shape:
  the board outline again, w0.2

## Dimensions
140,0 to 140,35 on Dimensions
0,35 to 140,35 on Dimensions

## Text inside footprints (layer, text, board x,y; h text height)
C100: Bottom Overlay "+" at 15.179,29.238 h1.52
U104: Bottom Overlay "MT3608" at 25.5,15.798 h4; Bottom Overlay "IN-" at 35,22.5 h2; Bottom Overlay "IN+" at 35,9.75 h2; Bottom Overlay "OUT-" at 7,22.524 h2; Bottom Overlay "OUT+" at 7.25,9.524 h2
U105: Bottom Overlay "OUT+" at 66.5,12.512 h1; Bottom Overlay "OUT-" at 66.25,19.512 h1; Bottom Overlay "IN+" at 76.25,12.5 h1; Bottom Overlay "IN-" at 76,19.5 h1; Bottom Overlay "hw-187" at 74,15.786 h3